# Altium PCB MAIN-PCB.PcbDoc
Units mm, origin at the board's own origin, x right, y up, seen from the top; angles counter-clockwise.
Board outline 80 x 79 mm, 2 copper layers (Top Layer, Bottom Layer), stack 1.591 mm thick; 44 components, 45 nets, 189 pads, 260 vias.
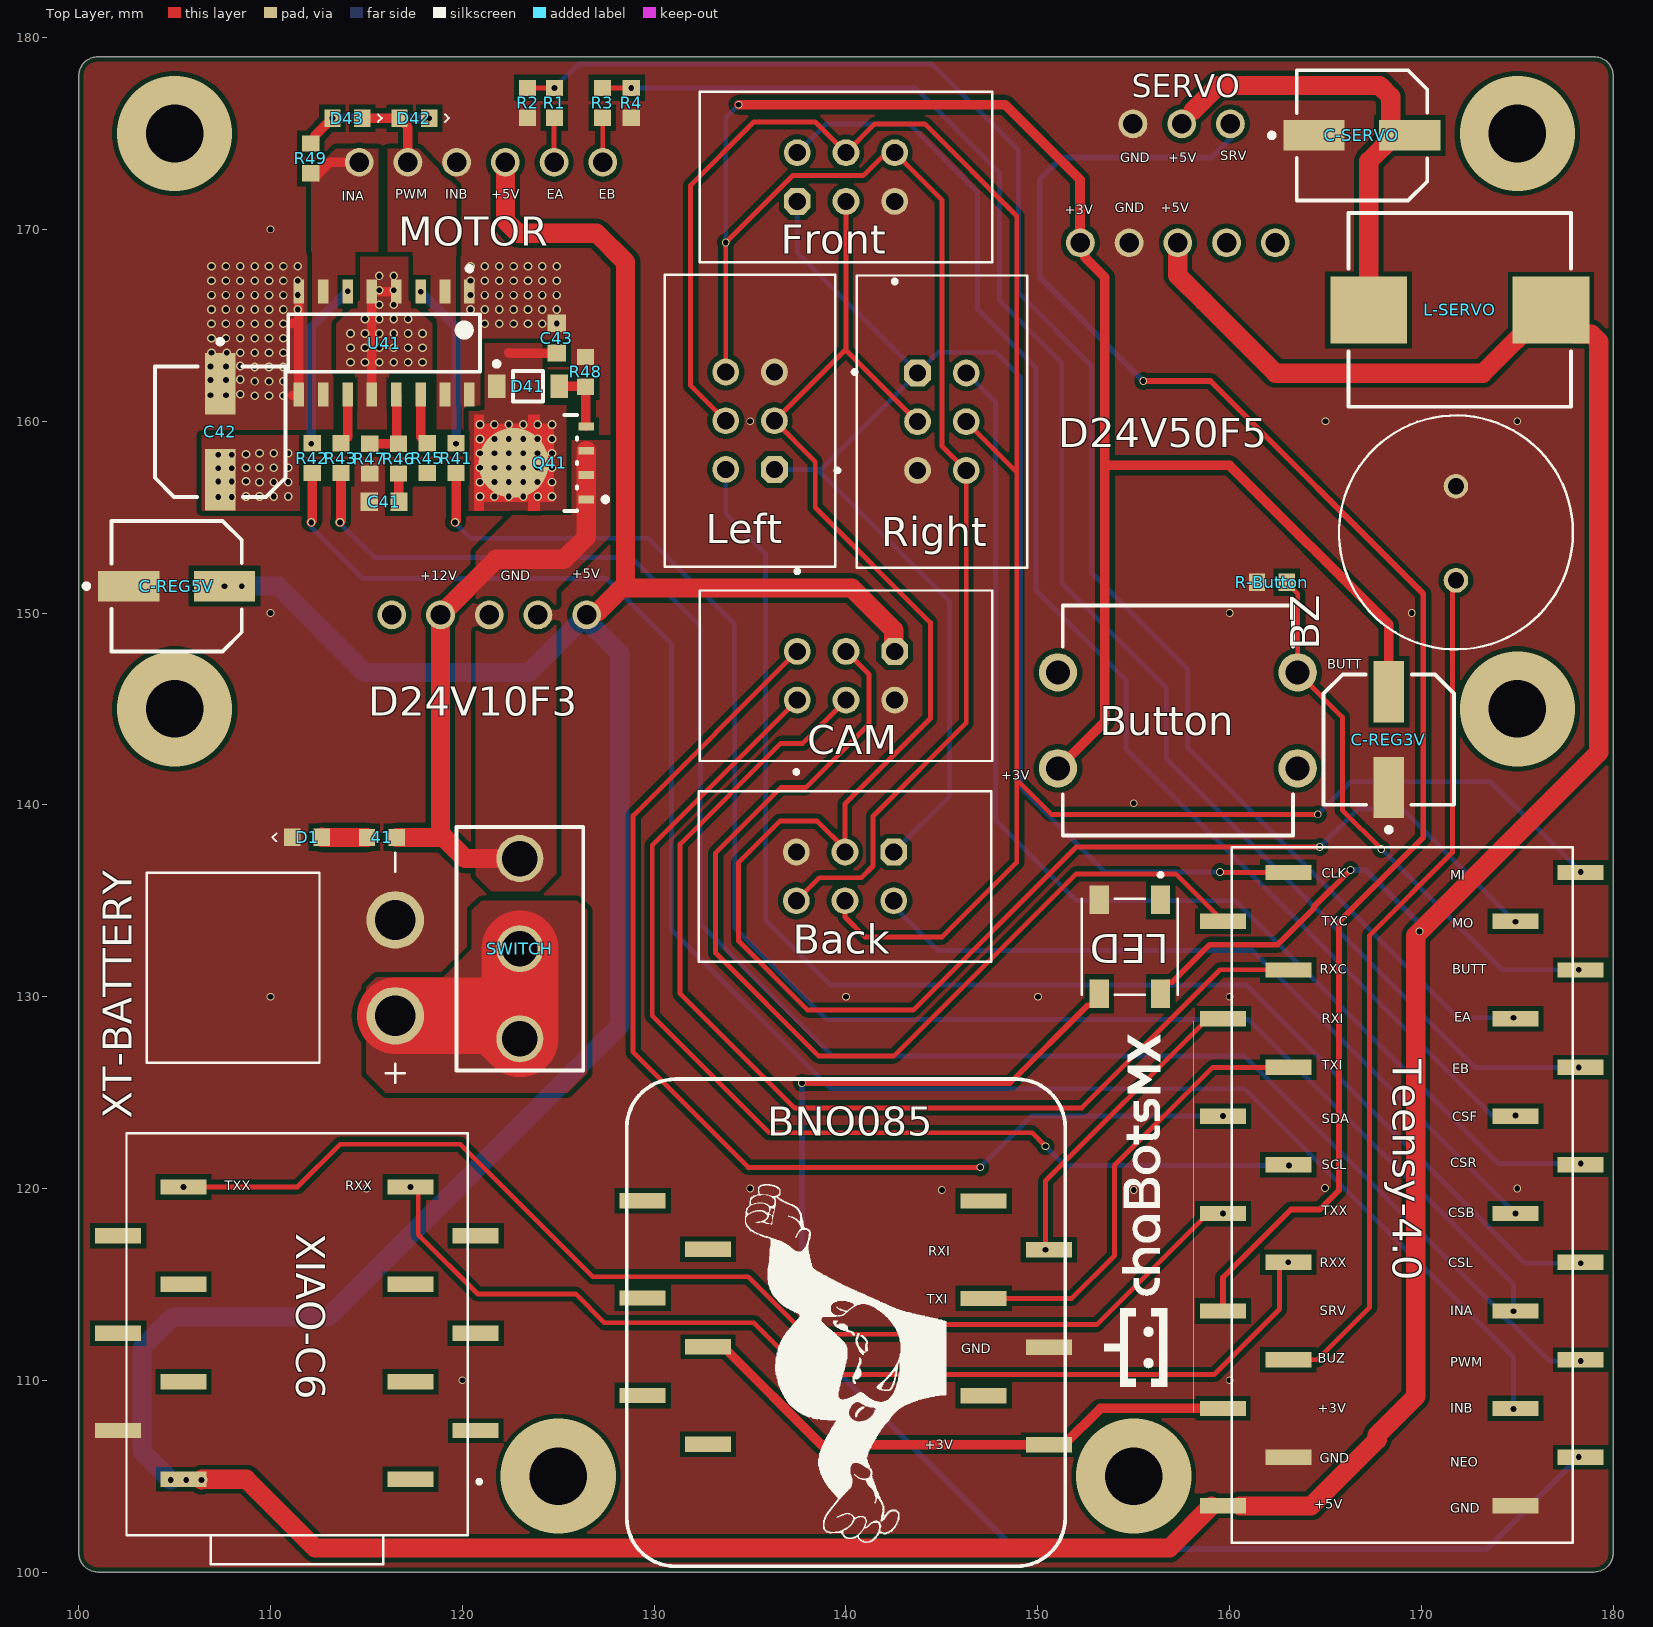
[diagram p0: Top Layer view]
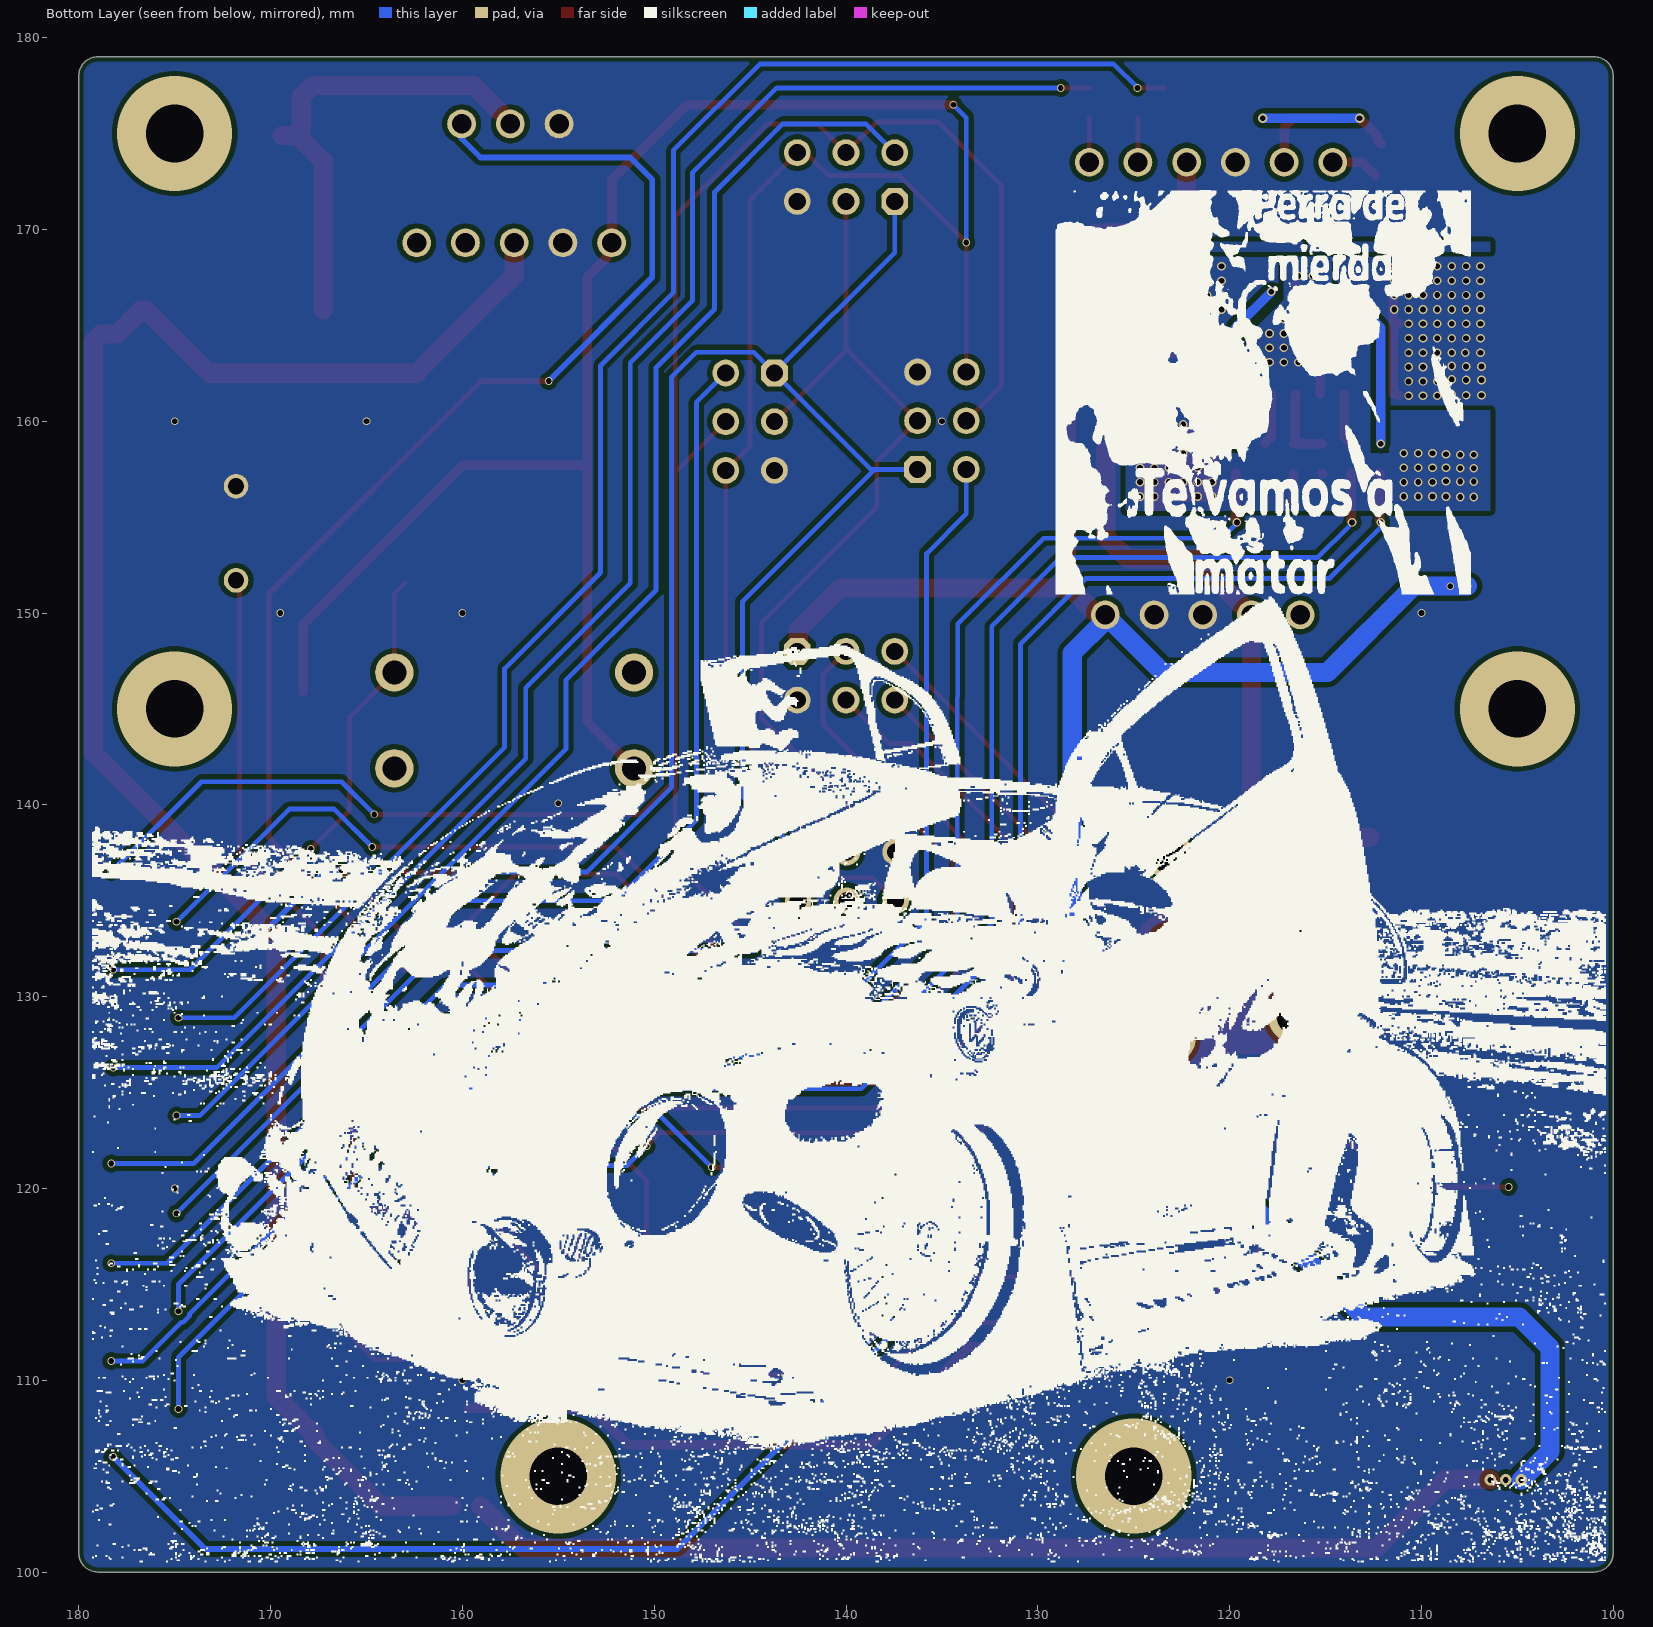
[diagram p1: Bottom Layer view, seen from below]
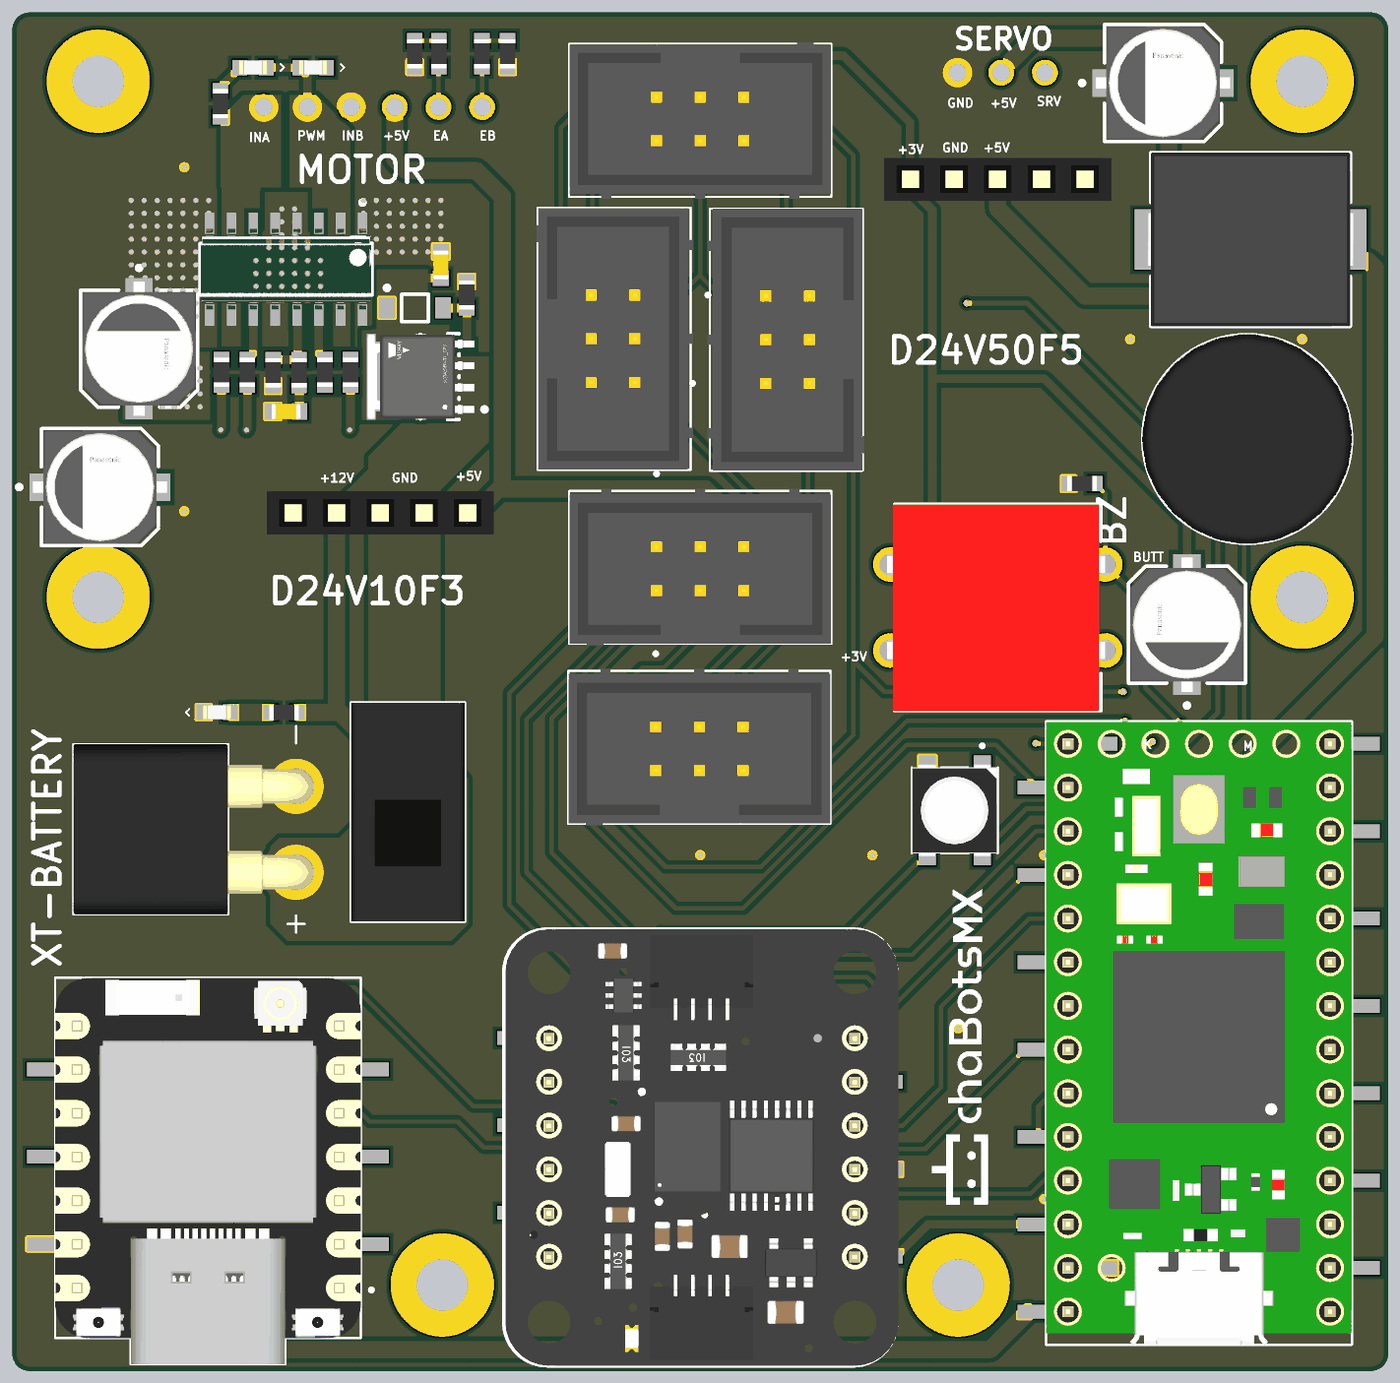
[diagram p2: 3D render of the assembled board from above, using the file's embedded part models]

## Layer stack, top to bottom
Top Solder: solder mask 0.0102, Solder Resist, Dk 3.5
Top Layer: signal copper 0.0356
Dielectric 1: dielectric 1.52, FR-4, Dk 4.8
Bottom Layer: signal copper 0.0356
Bottom Solder: solder mask 0.0102, Solder Resist, Dk 3.5

## Board outline
101,100 cw(c101,101) 100,101 100,178 cw(c101,178) 101,179 179,179 cw(c179,178) 180,178 180,101 cw(c179,101) 179,100

## Design rules (kind name [scope] priority, off if disabled: settings)
BoardOutlineClearance [All] p1: gap=0.254 ignorepadtopadclearanceinfootprint=FALSE except(0: Arc-SplitContinuation Track-SplitContinuation SMDPad-SplitContinuation THPad-SplitContinuation Via-SplitContinuation Fill-SplitContinuation Poly-SplitContinuation Region-SplitContinuation Text-SplitContinuation)
Clearance [All] p1: gap=0.254 ignorepadtopadclearanceinfootprint=FALSE
ComponentClearance [All] p1 off: gap=0.254 collisioncheckmode=3 verticalgap=0.254 showdistances=FALSE
PolygonConnect [All] p1: connectstyle=Direct reliefconductorwidth=0.254 reliefentries=4 polygonreliefangle="90 Angle" airgapwidth=0.254
RoomDefinition VNH7070-P [InComponentClass('VNH7070-P')] p1: confinementstyle=ConfineIn formatcopy=TRUE lockcomponents=FALSE outline 103.32,154.7 128.02,154.7 128.02,177 103.32,177
RoutingVias [All] p1: holewidth=0.711 width=1.27 viastyle="Through Hole" minholewidth=0.711 minwidth=1.27 maxholewidth=0.711 maxwidth=1.27
SolderMaskExpansion [All] p1: expansion=0.102 istentingtop=FALSE
SupplyNets "Schematic Supply Nets_6" [InNet('+3')] p1: voltage=0.000
SupplyNets "Schematic Supply Nets_5" [InNet('+BAT')] p2: voltage=0.000
SupplyNets "Schematic Supply Nets_4" [InNet('+5V')] p3: voltage=0.000
SupplyNets "Schematic Supply Nets_2" [InNet('+12V')] p4: voltage=0.000
SupplyNets "Schematic Supply Nets_1" [InNet('+3V3')] p5: voltage=0.000
SupplyNets "Schematic Supply Nets" [InNet('GND')] p6: voltage=0.000
Width [All] p1: maxlimit=200 minlimit=0.1 preferedwidth=0.254
29 further rules are at their usual default settings.

## Classes and differential pairs
component class VNH7070-P: C41 C42 C43 D41 D42 D43 Q41 R41 R42 R43 R45 R46 R47 R48 R49 U41
component class WRO: 3 41 * Back BNO085 Button BZ C-REG3V C-REG5V C-SERVO CAM D1 D24V10F3 D24V50F5 Front J5-CAM L-SERVO LED Left Motor R1 R2 R3 R4 R-Button Right SERVO SWITCH Teensy-4.0 xiao XIAO-C6 XT-BATTERY

## Components (designator, comment, footprint, x,y, rotation, side; value= is the part's Value field where it differs from the comment)
41 "4.7KΩ" RES_0603 115.8,138.3 r180 top
Back "IDC-6PIN-TH-2.54" IDC-6PIN-TH-2.54 139.975,136.27 r270 top
BNO085 "BNO085" BNO085 140,113 r90 top
Button "BUTTON-1212" BUTTON 157.2,144.4 r0 top
BZ "BUZZER-PS1240P02BT" BUZZER 171.8,154.2 r90 top
C41 "10NF" CAP_0603 115.92,155.8 r0 top
C42 "270UF" FP-FTD8-MFG 107.37,159.45 r270 top
C43 "0.1UF" CAP_0603 124.92,164.325 r90 top
C-REG3V "47UF" FP-FTD8-MFG 168.3,143.4 r90 top
C-REG5V "47UF" FP-FTD8-MFG 105.1,151.4 r0 top
C-SERVO "270UF" FP-FTD8-MFG 166.9,174.9 r0 top
CAM "IDC-6PIN-TH-2.54" IDC-6PIN-TH-2.54 140.025,146.73 r270 top
D1 "LED_0603" LED_0603 111.9,138.3 r180 top
D24V10F3 "REG-5V" 5PIN-TH 121.4,149.9 r180 top
D24V50F5 "REG-3V" 5PIN-TH 157.3,169.3 r0 top
D41 "MMSZ4702T1G" ONSC-SOD-123-2-425-04_V 123.42,161.825 r0 top
D42 "LED_0603" LED_0603 117.5,175.8 r0 top
D43 "LED_0603" LED_0603 114,175.8 r0 top
Front "IDC-6PIN-TH-2.54" IDC-6PIN-TH-2.54 139.975,172.73 r90 top
L-SERVO "22UH" WRO-INDUCTOR 172,165.8 r0 top
LED "NEOPIXEL-5050" NEOPIXEL-5050 154.8,132.6 r90 top
Left "IDC-6PIN-TH-2.54" IDC-6PIN-TH-2.54 135,160 r180 top
MOTOR "6PIN-TH" 6PIN-TH 121,173.5 r0 top (schematic designator Motor)
Q41 "SQJ409EP-T1_GE3" FP-T16-0221-SINGLE-MFG 123.74,157.825 r90 top
R1 "10KΩ" RES_0603 124.8,176.6 r270 top
R2 "10KΩ" RES_0603 123.4,176.6 r90 top
R3 "10KΩ" RES_0603 127.3,176.6 r270 top
R4 "10KΩ" RES_0603 128.8,176.6 r90 top
R41 "1KΩ" RES_0603 119.67,158.075 r90 top
R42 "1KΩ" RES_0603 112.17,158.075 r90 top
R43 "1KΩ" RES_0603 113.67,158.075 r90 top
R45 "1KΩ" RES_0603 118.17,158.075 r90 top
R46 "10KΩ" RES_0603 116.67,158.05 r90 top
R47 "1.5KΩ" RES_0603 115.17,158.05 r90 top
R48 "1KΩ" RES_0603 126.42,162.575 r270 top
R49 "4.7KΩ" RES_0603 112.1,173.7 r270 top
R-Button "10KΩ" RES_0603 162.2,151.6 r180 top
Right "IDC-6PIN-TH-2.54" IDC-6PIN-TH-2.54 145,160 r0 top
SERVO "3PIN" 3PIN 157.5,175.5 r180 top
SWITCH "Slide Switch 6A" "SLIDE SWITCH 6A" 123,132.5 r0 top
Teensy-4.0 "Teensy-4.0-SMD" TEENSY-4.0-SMD 169,120 r180 top
U41 "VNH7070ASTR" FP-SO-16N-GAPGCFT00818-MFG 115.92,164.075 r270 top
XIAO-C6 "XIAO-C6-S3-SMD" XIAO-C6-S3-SMD 111.405,112.397 r180 top
XT-BATTERY "XT30_PW_M" XT30_PW_M 106.5,131.5 r90 top

## Footprints (in the part's own frame and the unit in brackets; to place one, negate y for a bottom-side part, rotate by r counter-clockwise, add the part's x,y. Pads: shape width x height; smd on the part's side, far side on the other; paste and mask are expansions set on the pad)
3PIN [mm]
  round 1.5 hole 1.02: 1(-2.54,0) 2(0,0) 3(2.54,0)
5PIN-TH [mm]
  round 1.5 hole 1.02: 1(-5.08,0) 2(-2.54,0) 3(0,0) 4(2.54,0) 5(5.08,0)
  body extent -6.6,-1.25 6.6,1.25, height 4.6
6PIN-TH [mm]
  round 1.5 hole 1.02: 1(-6.38,0) 2(-3.84,0) 3(-1.3,0) 4(1.24,0) 5(3.78,0) 6(6.32,0)
BNO085 [mm]
  rect 0.8x2.4 smd: 3V(-3.815,-7.175) BT(-6.335,7.2) CS(6.365,10.6) DI(3.825,7.2) GND(-1.275,-10.575) INT(6.345,-7.175) P0(-3.795,10.6) P1(-1.255,7.2) RST(1.285,10.6) SCL(1.265,-7.175) SDA(3.805,-10.575) VIN(-6.355,-10.575)
  silkscreen extent -12.7,-11.43 12.7,11.43, body extent -12.7,-11.53 12.7,11.33, height 15.6
BUTTON [mm]
  round 2 hole 1.25: 1(-6.15,2.5) 2(6.35,2.5) 3(-6.15,-2.5) 4(6.35,-2.5)
  silkscreen extent -5.9,-6 6.1,6, body extent -6.9,-6 6.9,6, height 10.3
BUZZER [mm]
  round 1.28 hole 0.85: 1(-2.5,0) 2(2.413,0)
  silkscreen extent -6.1,-6.1 6.1,6.1, body extent -6.1,-6.1 6.1,6.1, height 6.5
CAP_0603 [mm] "Chip Capacitor, 2-Leads, Body 1.60x0.80mm, IPC Medium Density"
  rect 0.9x0.95 smd: 1(-0.775,0) 2(0.775,0)
  body extent -0.85,-0.45 0.85,0.45, height 0.55
FP-FTD8-MFG [mm]
  rect 3.2x1.6 smd paste+0 mask+0: 1(-2.5,0) 2(2.5,0)
  silkscreen extent -4.82,-3.4 3.4,3.4, body extent -4.35,-3.65 4.35,3.65, height 0.25
FP-SO-16N-GAPGCFT00818-MFG [mm]
  rect 1.25x0.55 smd paste+0 mask+0: 1(-2.675,4.445) 2(-2.675,3.175) 3(-2.675,1.905) 4(-2.675,0.635) 5(-2.675,-0.635) 6(-2.675,-1.905) 7(-2.675,-3.175) 8(-2.675,-4.445) 9(2.675,-4.445) 10(2.675,-3.175) 11(2.675,-1.905) 12(2.675,-0.635) 13(2.675,0.635) 14(2.675,1.905) 15(2.675,3.175) 16(2.675,4.445)
  silkscreen extent -4,-5 1.5,5, body extent -3.4,-5.1 3.4,5.1, height 0.25
FP-T16-0221-SINGLE-MFG [mm]
  rect 0.41x0.82 smd paste+0 mask+0: 1(-1.905,-2.715) 2(-0.635,-2.715) 3(0.635,-2.715) 4(1.905,-2.715)
  round 3.655 smd paste+0 mask+0: 5(0,1.07)
  Top Layer region: -2.5,3.125 2.5,3.125 2.5,2.615 2.03,2.615 2.03,0.305 2.5,0.305 2.5,-0.305 2.03,-0.305 2.03,-1.015 -2.03,-1.015 -2.03,-0.305 -2.5,-0.305 -2.5,0.305 -2.03,0.305 -2.03,2.615 -2.5,2.615
  silkscreen extent -2.5,-3.84 2.5,-1.57, body extent -2.73,-3.22 2.73,3.22, height 0.25
IDC-6PIN-TH-2.54 [mm]
  oct 1.398x1.398 hole 0.89: 1(-1.27,2.515)
  round 1.398 hole 0.89: 2(-1.27,-0.025) 3(-1.27,-2.565) 4(1.27,-2.565) 5(1.27,-0.025) 6(1.27,2.515)
  silkscreen extent -5.54,-7.65 4.45,7.59, body extent -4.57,-7.64 4.53,7.58, height 9
LED_0603 [mm]
  rect 0.85x0.9 smd: A(-0.776,-0.009) C(0.774,-0.009)
  silkscreen extent 1.6,-0.2 1.8,0.2, body extent -0.8,-0.4 0.8,0.4, height 0.35
NEOPIXEL-5050 [mm]
  rect 1.5x1 smd: 1(2.45,-1.6) 2(2.45,1.6) 3(-2.45,1.6) 4(-2.45,-1.6)
  silkscreen extent -2.5,-2.5 3.85,2.5, body extent -2.7,-2.49 2.7,2.51, height 1.5
ONSC-SOD-123-2-425-04_V [mm] "SOD, 2-Leads, Body 2.69x1.6mm"
  rect 0.91x1.22 smd: 1(-1.635,0) 2(1.635,0)
  silkscreen extent -1.76,-0.8 0.78,1.28, body extent -1.35,-0.8 1.35,0.8, height 1.35
RES_0603 [mm] "Chip Resistor, 2-Leads, Body 1.60x0.80mm, IPC Medium Density"
  rect 0.85x0.9 smd: 1(-0.775,0) 2(0.775,0)
  body extent -0.85,-0.45 0.85,0.45, height 0.55
"SLIDE SWITCH 6A" [mm]
  round 2.45 hole 1.85: 1(0,4.7) 2(0,0) 3(0,-4.7)
  silkscreen extent -3.3,-6.35 3.3,6.35, body extent -3.3,-6.35 3.3,6.35, height 13.33
TEENSY-4.0-SMD [mm]
  rect 2.4x0.8 smd: 0(-9.3,14.01) 1(-5.9,11.47) 2(-9.3,8.93) 3(-5.9,6.39) 3.3V(9.34,11.47) 4(-9.3,3.85) 5(-5.9,1.31) 6(-9.3,-1.23) 7(-5.9,-3.77) 8(-9.3,-6.31) 9(-5.9,-8.85) 10(-9.3,-11.39) 11(-5.9,-13.93) 12(-9.3,-16.47) 13(5.94,-16.47) 14(9.34,-13.93) 15(5.94,-11.39) 16(9.34,-8.85) 17(5.94,-6.31) 18(9.34,-3.77) 19(5.94,-1.23) 20(9.34,1.31) 21(5.94,3.85) 22(9.34,6.39) 23(5.94,8.93) GND1(-5.9,16.55) GND2(5.94,14.01) VIN(9.34,16.55)
  silkscreen extent -8.89,-17.78 8.89,18.48, body extent -8.89,-17.74 8.89,18.52, height 15.44
WRO-INDUCTOR [mm] "Molded Inductor, 2-Leads, Body 11.55x10.05mm, IPC Medium Density"
  rect 4x3.5 smd: 1(-4.75,0) 2(4.75,0)
  silkscreen extent -5.8,-5.05 5.8,5.05, body extent -6.02,-5.05 6.02,5.05, height 4
XIAO-C6-S3-SMD [mm]
  rect 2.4x0.8 smd: 1(-5.89,7.56) 2(-9.29,5.02) 3(-5.89,2.48) 4(-9.29,-0.06) 5(-5.89,-2.6) 6(-9.29,-5.14) 7(-5.89,-7.68) 8(5.95,-7.68) 9(9.35,-5.14) 10(5.95,-2.6) 11(9.35,-0.06) 12(5.95,2.48) 13(9.35,5.02) 14(5.95,7.56)
  silkscreen extent -9.57,-10.48 8.92,12, body extent -8.86,-10.46 8.92,12, height 15.51
XT30_PW_M [mm]
  round 3 hole 2.1: N(2.5,-10) P(-2.5,-10)
  silkscreen extent -6,-10.5 6,2.95, body extent -4.95,-11 4.95,2.95, height 5

## Part data
41 R1 R2 R3 R4 R41 R42 R43 R45 R46 R47 R48 R49 R-Button: library part RES_0603, "Resistor SMD 0603 generic"
Button: library part BUTTON
C41 C43: library part CAP_0603, "Capacitor SMD 0603 generic"
C42 C-REG3V C-REG5V C-SERVO: library part CMP-05427-000088-1, "CAP ALUM 220UF 20% 25V SMD", Capacitance=220uF, Case/Package=Radial, Dielectric Material=Aluminium, ESR (Equivalent Series Resistance)=160mR, Leakage Current=55uA, Max Operating Temperature=105°C, Min Operating Temperature=-55°C, Package Quantity=1, Ripple Current=600mA, Tolerance=20%, Voltage=25V, Construction=Cylindrical, Contact Plating=Tin, Diameter=6.3mm, Height=7.7mm, Height - Seated (Max)=0.315inch, Lead Diameter=0.65mm, Lead Free="Lead Free", Lead Pitch=1.8mm, Length=7.7mm, Life (Hours)=2000Hour, Mount="Surface Mount", Number of Pins=8, Packaging="Tape and Reel", Radiation Hardening=No, REACH SVHC="No SVHC", Ripple Current (AC)=600mA, RoHS Compliant=Yes, Series=FT, Termination=SMD/SMT, Voltage Rating=25V, Voltage Rating (DC)=25V
D24V10F3 D24V50F5: library part 5PIN-TH, "2.54 Header"
D41: library part CMP-1060-00296-1, "Zener Voltage Regulator, 500 mW, 2-Pin SOD-123, Pb-Free, Tape and Reel", Manufacturer="On Semiconductor", ComponentLink1Description="Manufacturer URL", ComponentLink1URL=http://www.onsemi.com/, ComponentLink2Description=Datasheet, ComponentLink2URL=http://www.onsemi.com/pub_link/Collateral/MMSZ4678T1-D.PDF, ComponentLink3Description="Package Specification", ComponentLink3URL=http://www.onsemi.com/pub_link/Collateral/425-04.PDF, DatasheetVersion="Rev. 9", Mounting Technology="Surface Mount", P Max (W)=0.5, PackageDescription="2-Pin SOD, Body 1.6 x 2.69 mm", PackageReference=SOD-123-2-425-04, PackageVersion="Rev. G, 10/2009", Packing="Tape and Reel", PartNumber=MMSZ4702T1G, RoHS=Pb-Free, VZ Typ (V)=15
L-SERVO: library part WRO-INDUCTOR, "Voltage Boost Inductor"
Q41: library part CMP-02550-000144-1, "MOSFET P-CH 40V 60A POWERPAKSO-8", Continuous Drain Current=-60A, Drain To Source Breakdown Voltage=-40V, Drain To Source Resistance=0.0058Ω, Gate To Source Voltage=20V, Input Capacitace At Vds="8400pF @ -25V", Manufacturer=Vishay, Max Forward Diode Voltage=-1.2V, Max Junction Temp=+175°C, Package=T16-0221-SINGLE, Power Dissipation=68W, Pulse Drain Current=-150A, Temperature="-55°C to +175°C", Temperature Range Low=-55°C, Typ Forward Diode Voltage=-0.76V, Automotive=Yes, Automotive Grade="Grade 0", Category=Trans, ComponentLink2Description=Datasheet, ComponentLink2URL=https://www.vishay.com/docs/77707/sqj409ep.pdf, Depletion Mode=False, Device Class L1="Discrete Semiconductors", Device Class L2=Transistors, Device Class L3=MOSFETs, Digikey Description="MOSFET P-CH 40V 60A POWERPAKSO-8", Drain To Source Voltage=-40V, Footprint Url=http://www.vishay.com/docs/63818/ppso8ls.pdf, Gate Charge At Vgs="170nC @ -10V", Height=1.267mm, Lead Free=Yes, Manufacturer Part Number=SQJ409EP-T1_GE3, Mouser Description="Trans MOSFET P-CH 40V 60A Automotive 5-Pin(4+Tab) PowerPAK SO T/R", Number of Channels=1, Number Of P Channels=1, Octopart=https://octopart.com/sqj409ep-t1_ge3-vishay-82218774, Reverse Recovery Charge=45nC, Reverse Recovery Time=39ns, RoHS=TRUE, Rthja Max=68°C/W, Standoff Height=0mm, Temperature Range High=+175°C, Threshold Vgs Max=-2.5V, Threshold Vgs Min=-1.5V, Transconductance=54S, Turn Off Delay Time=75ns, Turn On Delay Time=23ns
SERVO: "2.54 Header"
U41: library part CMP-2000-07519-2, "IC MOTOR DRIVER 4V-28V 16SOIC", Manufacturer=STMicroelectronics, Max Junction Temp=+150°C, Max Supply Voltage=28V, Min Supply Voltage=4V, Nominal Supply Current=2-3.5mA, Output Current=15A, Package=SO-16N-GAPGCFT00818, Temperature="-40°C to +150°C", Temperature Range Low=-40°C, Automotive=Yes, Automotive Grade="Grade 0", Category=IC, ComponentLink2Description=Datasheet, ComponentLink2URL=https://www.st.com/resource/en/datasheet/vnh7070as.pdf, Device Class L1="Integrated Circuits (ICs)", Device Class L2="Power Management ICs", Device Class L3="Motor Drivers", Digikey Description="IC MOTOR DRIVER 4V-28V 16SOIC", Footprint Url=https://www.st.com/resource/en/datasheet/l6566a.pdf, Height=1.75mm, Ipc Land Pattern Name=SOIC127P600X175-16, Lead Free=Yes, Manufacturer Part Number=VNH7070ASTR, Motor Type=Brushed, Mouser Description="STMicroelectronics VNH7070ASTR Motor Driver IC 16-Pin, SOIC", Number Of Outputs=2, Octopart=https://octopart.com/vnh7070astr-stmicroelectronics-66668687, RoHS=TRUE, Standoff Height=0.1mm, Temperature Range High=+150°C

## Via types
v1: diameter 0.45, hole 0.3, Top Layer to Bottom Layer, tented both sides, 193 vias
v2: diameter 0.4, hole 0.3, Top Layer to Bottom Layer, 56 vias
v3: diameter 6, hole 3, Top Layer to Bottom Layer, 6 vias
v4: diameter 0.6, hole 0.3, Top Layer to Bottom Layer, 3 vias
v5: diameter 0.5, hole 0.3, Top Layer to Bottom Layer, 2 vias

## Nets (pads, with @x,y where several pads share a name; then routed paths per layer and width w, separated by ;. In a path a pad name is that pad's centre, name@x,y a point inside that pad or via, vN(x,y) a via of type N, cw(c..) or ccw(c..) an arc to the next point about the centre after c; other vN are vias at no path point)
+3: BNO085.P1 BNO085.VIN Teensy-4.0.3.3V | length 29.8
  Top Layer w0.5: BNO085.P1 133.6,111.745 138.7,106.645 150.575,106.645 151.375,106.645 153.26,108.53 Teensy-4.0.3.3V
+3V3: Back.4 Button.3 C-REG3V.2 D24V50F5.1 Front.4 Left.4 Right.4 | length 143.9
  Top Layer w0.254: Left.4 v2(133.73,169.317) 137.213,172.8 140.9,172.8 141.881,173.781 142.321,173.781 Front.4 145,171.54 145,158.705 Right.4 146.27,144.27 141.41,139.41 141.41,136.81 140.8,136.2 138.61,136.2 Back.4
  Top Layer w0.5: v2(134.4,176.5) 148.3,176.5 152.2,172.6 D24V50F5.1@152.2,169.3 ; Button.3 153.5,144.35 153.5,157.7 ; D24V50F5.1 152.458,169.062 152.458,168.542 153.5,167.5 153.5,157.7 ; C-REG3V.2 168.3,149.4 160,157.7 153.5,157.7
  Bottom Layer w0.254: v2(133.73,169.317) 133.73,175.83 v2(134.4,176.5)
+5V: C-REG5V.2 CAM.1 D24V10F3.1 D24V50F5.3 L-SERVO.2 LED.4 MOTOR.4 Teensy-4.0.VIN XIAO-C6.14 | length 300.4
  Top Layer w0.3: LED.4 156.4,130.4 156.75,130.75 157,130.75 158.95,132.7 162.5,132.7 164.39,134.59 164.39,134.69 v2(166.3,136.6)
  Top Layer w1: v4(106.4,104.8) 106.437,104.837 108.736,104.837 112.327,101.246 156.856,101.246 Teensy-4.0.VIN@159.06,103.45 ; MOTOR.4 122.24,170.46 122.9,169.8 127,169.8 128.5,168.3 128.5,151.5 127.05,150.05 126.835,150.05 126.585,149.8 D24V10F3.1@126.45,149.8 ; 128.5,151.3 140.3,151.3 142.485,149.115 142.485,148.055 CAM.1 ; D24V50F5.3 157.3,167.6 158.65,166.25 162.4,162.5 173.2,162.5 176.5,165.8 L-SERVO.2 178,164.55 178.85,164.55 179.246,164.154 179.246,142.732 169.7,133.186 169.7,109.15 167.7,107.15 ; Teensy-4.0.VIN@160.55,103.45 164.25,103.45 167.7,106.9
  Bottom Layer w0.3: v2(166.3,136.6) 167.1,136.6 169.9,133.8 v2(169.9,133.4)
  Bottom Layer w1: v4(104.8,104.8) 103.3,106.3 103.3,111.7 104.9,113.3 113,113.3 128.2,128.5 128.2,147.915 126.45,149.665 D24V10F3.1@126.45,149.8 ; v2(107.6,151.4) v2(108.5,151.4) 110.4,151.4 114.9,146.9 123.48,146.9 D24V10F3.1
  other v4: 105.6,104.8
+12V: 41.1 D24V10F3.4 Q41.1 Q41.2 Q41.3 SWITCH.1 | length 32.3
  Top Layer w1: 41.1 119.041,138.3 ; SWITCH.1 120.141,137.2 119.041,138.3 ; Q41.3 Q41.2 Q41.1 126.455,153.955 125.3,152.8 121.76,152.8 D24V10F3.4 118.86,138.481 119.041,138.3
+BAT: SWITCH.2 SWITCH.3 XT-BATTERY.P | length 11.7
  Top Layer w4: XT-BATTERY.P 121.8,129 SWITCH.3 SWITCH.2
BUTTON: Button.2 R-Button.1 Teensy-4.0.10 | length 28.8
  Top Layer w0.254: R-Button.1 162.975,151.575 163.55,151 Button.2 165.878,144.572 165.878,139.722 v2(167.9,137.7)
  Bottom Layer w0.254: v2(167.9,137.7) 174.2,131.4 v2(178.2,131.4)
BUZZER: BZ.1 Teensy-4.0.23 | length 45.1
  Top Layer w0.254: Teensy-4.0.23 164.57,111.07 167.3,113.8 167.3,133.2 171.619,137.519 171.619,151.519 BZ.1
CS1: Front.6 Teensy-4.0.7 | length 72
  Bottom Layer w0.25: Front.6 138.96,175.5 143.3,175.5 146.85,171.95 146.85,165.85 149.9,162.8 149.9,151.2 154.6,146.5 154.6,142.9 173.7,123.8 v2(174.9,123.8)
CS2: Left.6 Teensy-4.0.4 | length 74.3
  Bottom Layer w0.25: Left.6 133.73,155.17 135.8,153.1 135.8,134 139.2,130.6 160.9,130.6 175.4,116.1 v2(178.3,116.1)
CS3: Right.6 Teensy-4.0.6 | length 61.9
  Bottom Layer w0.25: Right.6 147.8,160.985 147.8,139.2 152,135 160.3,135 174,121.3 v2(178.3,121.3)
CS4: Back.6 Teensy-4.0.5 | length 39.3
  Bottom Layer w0.25: Back.6 142.49,134.71 144.8,132.4 161.2,132.4 v2(174.9,118.7)
EA: R1.1 R2.2 Teensy-4.0.9 | length 85.6
  Top Layer w0.25: R2.2 v2(124.8,177.375)
  Bottom Layer w0.25: v2(124.8,177.375) 126.046,178.621 144.5,178.621 149,174.121 149,166.7 152.8,162.9 152.8,152.1 157.8,147.1 157.8,143 171.9,128.9 v2(174.8,128.9)
EB: R3.1 R4.2 Teensy-4.0.8 | length 84.9
  Top Layer w0.25: R3.1 v2(128.8,177.375)
  Bottom Layer w0.25: v2(128.8,177.375) 143.6,177.375 148,172.975 148,166.3 151.25,163.05 151.25,151.55 156.7,146.1 156.7,142.4 172.8,126.3 v2(178.2,126.3)
GND: Back.3 BNO085.GND BZ.2 C41.1 C42.1 C43.2 C-REG3V.1 C-REG5V.1 C-SERVO.1 CAM.6 D1.C D24V10F3.2 D24V10F3.3 D24V50F5.2 Front.3 LED.2 Left.3 MOTOR.3 R2.1 R4.1 R47.1 R48.1 R-Button.2 Right.3 SERVO.3 Teensy-4.0.GND1 Teensy-4.0.GND2 U41.1 U41.8 U41.9 U41.16 XIAO-C6.13 XT-BATTERY.N | length 10
  Top Layer w0.5: 111.17,161.35 111.183,161.338 ; 111.17,165.1 111.183,165.088 ; U41.8@111.45,166.875 111.475,166.85 U41.8 111.475,166.575 U41.9 v1@111.475,165.825 ; R47.1@115.158,157.263 R47.1
  other v1: 109.17,161.325 109.92,161.325 110.67,161.325 106.87,161.35 107.67,161.35 108.42,161.4 109.17,162.075 109.92,162.075 110.67,162.075 106.87,162.15 107.67,162.15 108.42,162.175 109.17,162.825 109.92,162.825 110.67,162.825 106.87,162.85 107.67,162.85 108.42,162.875 106.92,163.575 107.72,163.575 108.42,163.575 109.17,163.575 109.92,163.575 110.67,163.575 106.92,164.325 107.67,164.325 108.42,164.325 109.17,164.325 109.92,164.325 110.67,164.325 106.92,165.075 107.67,165.075 108.42,165.075 109.17,165.075 109.92,165.075 110.67,165.075 121.17,165.075 121.92,165.075 122.67,165.075 123.42,165.075 124.17,165.075 124.92,165.1 106.92,165.825 107.67,165.825 108.42,165.825 109.17,165.825 109.92,165.825 110.67,165.825 111.42,165.825 120.42,165.825 121.17,165.825 121.92,165.825 122.67,165.825 123.42,165.825 124.17,165.825 124.92,165.825 106.92,166.575 107.67,166.575 108.42,166.575 109.17,166.575 109.92,166.575 110.67,166.575 111.42,166.575 120.42,166.575 121.17,166.575 121.92,166.575 122.67,166.575 123.42,166.575 124.17,166.575 124.92,166.575 106.92,167.325 107.67,167.325 108.42,167.325 109.17,167.325 109.92,167.325 110.67,167.325 111.42,167.325 120.42,167.325 121.17,167.325 121.92,167.325 122.67,167.325 123.42,167.325 124.17,167.325 124.92,167.325 106.92,168.075 107.67,168.075 108.42,168.075 109.17,168.075 109.92,168.075 110.67,168.075 111.42,168.075 120.42,168.075 121.17,168.075 121.92,168.075 122.67,168.075 123.42,168.075 124.17,168.075 124.92,168.075
  other v2: 120,110 160,110 145,119.919 155,119.919 115,120 135,120 175,120 164.973,120.027 110,130 140,130 150.011,129.989 160,130 155,140.081 110,150 160,150 169.496,150 135,160 165,160 175,160 110,170
MCLK: Back.1 Front.1 Left.1 Right.1 Teensy-4.0.13 | length 88.6
  Top Layer w0.25: v2(159.5,136.5) 159.53,136.47 Teensy-4.0.13
  Bottom Layer w0.25: Left.1 138.5,157.485 ; Front.1 137.46,168.785 Right.1 ; Back.1 145.4,140.45 145.4,150.585 138.5,157.485 ; v2(159.5,136.5) 153.5,136.5 149.1,140.9 149.1,162.3 147.8,163.6 144.815,163.6 Right.1 ; 138.5,157.485 138.7,157.485 Right.1
MISO: Back.5 Front.5 Left.5 Right.5 Teensy-4.0.12 | length 116.7
  Top Layer w0.254: Left.5 131.9,161.855 131.9,172.3 135.2,175.6 138.4,175.6 Front.5 141.5,175.5 144.1,175.5 148.9,170.7 148.9,157.345 ; Back.5 139.95,134.15 141,133.1 145,133.1 148.9,137 148.9,141.3 ; Right.5 148.9,157.345 ; v2(164.6,139.5) 150.7,139.5 148.9,141.3 ; 148.9,141.3 148.9,157.345
  Bottom Layer w0.254: v2(164.6,139.5) 166.3,141.2 173.6,141.2 v2(178.3,136.5)
MOSI: Back.2 Front.2 Left.2 Right.2 Teensy-4.0.11 | length 105.9
  Top Layer w0.254: Back.2 Back.2@139.95,137.7 ; Front.2 140,163.755 ; Right.2 140,163.705 140,163.755 ; v2(164.7,137.8) 152,137.8 143.5,129.3 138,129.3 134.4,132.9 134.4,137 136.55,139.15 138.5,139.15 Back.2@139.95,137.7 ; Back.2@139.95,137.7 139.95,140.05 144.4,144.5 144.4,149.5 138.4,155.5 138.4,157.895 Left.2 140,163.755
  Bottom Layer w0.254: v2(164.7,137.8) 166.679,139.779 169.021,139.779 v2(174.9,133.9)
NEOPIXEL: LED.3 Teensy-4.0.0 | length 78
  Top Layer w0.3: v2(137.7,125.5) 148.55,125.5 152.6,129.55 152.85,129.55 153.2,129.9 LED.3
  Bottom Layer w0.3: v2(137.7,125.5) 137.7,112.3 148.8,101.2 173.4,101.2 178.19,105.99 v2@178.3,105.99
  other v2: 178.2,106
Net41_2: 41.2 D1.A | length 2.4
  Top Layer w1: D1.A 112.685,138.3 41.2
NetC41_2: C41.2 R46.1 | length 1.5
  Top Layer w0.5: R46.1 116.682,157.263 116.682,155.813 C41.2
NetC-SERVO_2: C-SERVO.2 L-SERVO.1 SERVO.2 | length 23.6
  Top Layer w1: 158.1,176.2 159.4,177.5 167.811,177.5 168.397,176.914 168.397,175.2 168.697,174.9 C-SERVO.2 ; L-SERVO.1 167.25,173.55 C-SERVO.2@168.6,174.9
NetD41_2: D41.2 Q41.4 R48.2 | length 3.4
  Top Layer w0.5: D41.2 125.067,161.813 126.407,161.813 R48.2 ; R48.2@126.437,161.783 126.437,159.747 Q41.4
NetD42_C: D42.C D43.A R49.1 | length 6.9
  Top Layer w0.5: R49.1 112.125,174.475 112.3,174.65 112.3,174.867 113.024,175.591 113.049,175.591 113.224,175.766 v5(113.224,175.791)
  Bottom Layer w0.5: v5(113.224,175.791) v5(118.274,175.791)
NetMotor_5: MOTOR.5 R1.2 | length 2.3
  Top Layer w0.25: MOTOR.5 124.78,175.805 R1.2
NetMotor_6: MOTOR.6 R3.2 | length 2.3
  Top Layer w0.25: R3.2 127.32,175.805 MOTOR.6
NetR41_1: R41.1 Teensy-4.0.3 | length 84.9
  Top Layer w0.5: v1(119.62,154.725) 119.62,154.752 119.67,154.802 R41.1
  Bottom Layer w0.25: v1@119.597,154.703 120.4,153.9 129.7,153.9 134.171,149.429 134.171,145.639 134.2,145.61 134.2,133.6 139,128.8 161,128.8 174.8,115 v2(174.8,113.6)
NetR41_2: R41.2 U41.3 | length 8.7
  Bottom Layer w0.5: v1(117.825,166.75) 119.67,164.905 v1@119.67,158.852
  other v1: 119.67,158.825
NetR42_1: R42.1 Teensy-4.0.1 | length 94.9
  Top Layer w0.5: v1(112.12,154.725) 112.12,154.752 112.17,154.802 R42.1
  Bottom Layer w0.25: v1(112.12,154.725) 112.12,154.48 114.8,151.8 127.5,151.8 130.9,148.4 130.9,133.5 139.2,125.2 160.8,125.2 174.8,111.2 v2(174.8,108.5)
NetR42_2: R42.2 U41.6 | length 8.7
  Bottom Layer w0.5: v1(112.12,158.825) 112.12,164.875 v1(114.02,166.775)
NetR43_1: R43.1 Teensy-4.0.2 | length 94.3
  Top Layer w0.5: v1(113.62,154.725) 113.62,154.752 113.67,154.802 R43.1
  Bottom Layer w0.25: 113.8,154.5 115.4,152.9 128.8,152.9 132.4,149.3 132.4,133.8 139.3,126.9 160.781,126.9 174.221,113.46 174.221,113.36 174.56,113.021 174.66,113.021 176.681,111 v2(178.3,111)
NetR43_2: R43.2 U41.11 | length 2.7
  Top Layer w0.5: R43.2 113.695,158.85 114.015,159.17 U41.11
NetR45_2: R45.2 U41.14 | length 2.7
  Top Layer w0.5: U41.14 117.825,159.17 118.145,158.85 R45.2
NetR46_2: R46.2 R47.2 U41.13 | length 4.1
  Top Layer w0.5: R47.2 R46.2 116.58,158.915 116.58,161.375 U41.13
OUTA: MOTOR.1 R49.2 U41.7 U41.10 | length 2.5
  Top Layer w0.5: R49.2@112.4,172.825 112.425,172.825 113.1,173.5 MOTOR.1
OUTB: D42.A D43.C MOTOR.2 U41.2 U41.15 | length 4.4
  Top Layer w0.5: D43.C D42.A 116.724,175.766 117.16,175.33 MOTOR.2
RX-BLE: Teensy-4.0.21 XIAO-C6.7 | length 54.8
  Top Layer w0.25: v2(117.295,120.077) 117.425,120.077 117.7,119.802 117.7,117.588 120.788,114.5 125.9,114.5 127.4,113 135.2,113 137.9,110.3 159.2,110.3 162.6,113.7 162.6,115.875 162.875,116.15 v2(163.06,116.15)
RX-CAM: CAM.5 Teensy-4.0.15 | length 56.7
  Top Layer w0.254: CAM.5 137.74,143.2 136.6,143.2 131.35,137.95 131.35,130.15 137.3,124.2 152.3,124.2 159.5,131.4 163.05,131.4 Teensy-4.0.15
RX-IMU: BNO085.SDA Teensy-4.0.16 | length 16.4
  Top Layer w0.25: v2(150.4,116.8) 150.4,120.39 158.86,128.85 Teensy-4.0.16
SCL: CAM.4 Teensy-4.0.19 | length 56
  Top Layer w0.254: CAM.4 129.9,137.9 129.9,129 136,122.9 149.7,122.9 v2(150.4,122.2)
  Bottom Layer w0.254: v2(150.4,122.2) 151.4,121.2 v2(163.1,121.2)
SDA: CAM.3 Teensy-4.0.18 | length 58.8
  Top Layer w0.254: CAM.3 128.9,139.44 128.9,127.1 134.9,121.1 v2(147,121.1)
  Bottom Layer w0.254: v2(147,121.1) 149.67,123.77 v2(159.66,123.77)
SERVO: SERVO.1 Teensy-4.0.22 | length 86.1
  Top Layer w0.3: v2(155.5,162.1) 159,162.1 170.1,151 170.1,138.3 165.7,133.9 165.7,119.9 164.7,118.9 163.2,118.9 159.66,115.36 Teensy-4.0.22
  Bottom Layer w0.3: v2(155.5,162.1) 150.1,167.5 150.1,172.6 151.25,173.75 159.05,173.75 160.04,174.74 SERVO.1
TX-BLE: Teensy-4.0.20 XIAO-C6.8 | length 61.8
  Top Layer w0.25: v2(105.455,120.077) 111.403,120.077 113.627,122.3 119.9,122.3 126.8,115.4 134.9,115.4 137.9,112.4 144.5,112.4 145,112.9 153.07,112.9 158.86,118.69 v2(159.66,118.69)
TX-CAM: CAM.2 Teensy-4.0.14 | length 53.9
  Top Layer w0.254: CAM.2 141.2,146.8 141.2,144.2 137.9,140.9 136.6,140.9 133.2,137.5 133.2,132.274 138.574,126.9 142.5,126.9 152,136.4 157.19,136.4 Teensy-4.0.14
TX-IMU: BNO085.SCL Teensy-4.0.17 | length 23.6
  Top Layer w0.254: BNO085.SCL 151.765,114.265 154,116.5 154,121.2 159.11,126.31 Teensy-4.0.17
VC: C42.2 C43.1 D41.1 Q41.5 U41.4 U41.5 U41.12 | length 9.5
  Top Layer w0.5: U41.12 U41.5 115.67,166.75 115.92,166.75 116.42,166.75 U41.4 116.555,167.1 U41.4@116.53,167.125 ; 122.42,163.575 122.445,163.55 C43.1
  other v1: 107.27,156.05 107.97,156.05 108.72,156.075 109.42,156.075 110.17,156.075 110.92,156.075 120.92,156.075 121.67,156.075 122.42,156.075 123.17,156.075 123.92,156.075 124.67,156.075 109.42,156.825 110.17,156.825 110.92,156.825 120.92,156.825 121.67,156.825 122.42,156.825 123.17,156.825 123.92,156.825 124.67,156.825 107.27,156.85 107.97,156.85 108.72,156.875 107.27,157.55 107.97,157.55 108.72,157.575 109.42,157.575 110.17,157.575 110.92,157.575 120.92,157.575 121.67,157.575 122.42,157.575 123.17,157.575 123.92,157.575 124.67,157.575 107.27,158.25 107.97,158.25 108.72,158.275 109.42,158.325 110.17,158.325 110.92,158.325 120.92,158.325 121.67,158.325 122.42,158.325 123.17,158.325 123.92,158.325 124.67,158.325 120.92,159.075 121.67,159.075 122.42,159.075 123.17,159.075 123.92,159.075 124.67,159.075 120.92,159.825 121.67,159.825 122.42,159.825 123.17,159.825 123.92,159.825 124.67,159.825 114.17,163.075 114.92,163.075 115.67,163.075 116.42,163.075 117.17,163.075 117.92,163.075 114.17,163.825 114.92,163.825 115.67,163.825 116.42,163.825 117.17,163.825 117.92,163.825 114.17,164.575 114.92,164.575 115.67,164.575 116.42,164.575 117.17,164.575 117.92,164.575 114.92,165.325 115.67,165.325 116.42,165.325 117.17,165.325 115.67,166.075 116.42,166.075 115.67,166.825 116.42,166.825 115.67,167.575 116.42,167.575
pads on no net: BNO085.3V BNO085.BT BNO085.CS BNO085.DI BNO085.INT BNO085.P0 BNO085.RST Button.1 Button.4 D24V10F3.5 D24V50F5.4 D24V50F5.5 LED.1 R45.1 XIAO-C6.1 XIAO-C6.2 XIAO-C6.3 XIAO-C6.4 XIAO-C6.5 XIAO-C6.6 XIAO-C6.9 XIAO-C6.10 XIAO-C6.11 XIAO-C6.12
copper on no net:
  other v3: 125,105 155,105 105,145 175,145 105,175 175,175

## Polygon pours and split planes (outlines as drawn)
GND on Bottom Layer "GND_L02_P026" (solid, pour order 26): 100,179 180,179 180,100 100,100
VC on Bottom Layer "Bottom Layer-VC" (solid, pour order 17): 106.42,160.575 106.42,155.325 125.42,155.325 125.42,160.825 120.17,160.825 120.17,158.325 119.17,158.325 119.17,164.325 117.17,166.325 117.17,168.575 114.67,168.575 114.67,166.825 112.67,164.825 112.67,158.325 111.67,158.325 111.67,160.575
OUTB on Bottom Layer "OUTB_L02_P018" (solid, pour order 18): 125.42,169.35 125.42,168.825 116.17,168.825 116.17,169.35
OUTA on Bottom Layer "OUTA_L02_P019" (solid, pour order 19): 115.92,169.35 115.92,168.825 106.42,168.825 106.42,169.35
GND on Bottom Layer "GND_L02_P022" (solid, pour order 22): 125.72,168.575 125.72,161.075 120.17,161.075 120.17,165.325 119.92,165.575 119.92,168.575
GND on Bottom Layer "GND_L02_P023" (solid, pour order 23): 111.92,168.575 111.92,165.325 111.67,165.075 111.67,160.825 106.12,160.825 106.12,168.575
GND on Top Layer "GND_L01_P027" (solid, pour order 27): 100,179 180,179 180,100 100,100
OUTB on Top Layer "OUTB_L01_P015" (solid, pour order 15): 116.12,168.825 116.12,174.2 117.72,174.2 119.67,172.25 119.67,168.825 119.67,159.575 118.67,159.575 118.67,165.325 117.42,166.575 117.42,168.825
+12V on Top Layer "+12V_L01_P011" (solid, pour order 11): 127.7,159 125.7,159 125.7,155.1 122.6,155.1 120.7,153.2 120.7,136.3 121.5,135.5 124,135.5 124.9,136.4 124.9,151.2 127.7,154
VC on Top Layer "VC_L01_P021" (solid, pour order 21): 125.42,155.325 125.42,160.825 124.17,160.825 124.17,164.075 121.17,164.075 121.17,160.575 120.32,160.575 120.32,155.325
GND on Top Layer "GND_L01_P012" (solid, pour order 12): 119.92,160.825 120.92,160.825 120.92,164.325 125.42,164.325 125.42,168.575 119.92,168.575
GND on Top Layer "GND_L01_P013" (solid, pour order 13): 111.92,168.575 111.92,159.575 106.42,159.575 106.42,168.575
VC on Top Layer "VC_L01_P014" (solid, pour order 14): 117.17,168.575 114.67,168.575 114.67,166.325 113.42,165.075 113.42,162.575 118.42,162.575 118.42,165.075 117.17,166.325
OUTA on Top Layer "OUTA_L01_P016" (solid, pour order 16): 115.62,168.825 115.62,174.2 113.395,174.2 112.12,172.925 112.12,168.825 112.17,168.825 112.17,159.575 113.27,159.575 113.27,165.175 114.42,166.325 114.42,168.825
VC on Top Layer "VC_L01_P020" (solid, pour order 20): 116.17,162.825 116.17,159.575 114.42,159.575 114.42,162.825
VC on Top Layer "VC_L01_P024" (solid, pour order 24): 111.52,159.275 111.52,155.325 106.42,155.325 106.42,159.275
+BAT on Top Layer "+BAT_L01_P025" (solid, pour order 25): 126,135 126.5,134.5 126.5,126 125.5,125 116,125 115,126 115,130.5 115.5,131 119,131 120.5,132.5 120.5,134.5 121,135

## Silkscreen, mask and mechanical layers (free items; w line width, h text height)
Top Overlay:
  drawing of 20 lines, arcs and shapes, not listed
  text "SRV" at 159.5,173.6 h0.5
  text "GND" at 154.3,173.5 h0.5
  text "+5V" at 156.8,173.5 h0.5
  text "PWM" at 116.5,171.6 h0.5
  text "INB" at 119.1,171.6 h0.5
  text "+5V" at 121.5,171.6 h0.5
  text "EA" at 124.4,171.6 h0.5
  text "EB" at 127.1,171.6 h0.5
  text "INA" at 113.7,171.5 h0.5
  text "GND" at 154,170.9 h0.5
  text "+5V" at 156.4,170.9 h0.5
  text "+3V" at 151.4,170.8 h0.5
  text "+5V" at 125.7,151.8 h0.5
  text "+12V" at 117.8,151.7 h0.5
  text "GND" at 122,151.7 h0.5
  text "BUTT" at 165.1,147.1 h0.5
  text "+3V" at 148.1,141.3 h0.5
  text "CLK" at 164.8,136.2 h0.5
  text "MI" at 171.5,136.1 h0.5
  text "TXC" at 164.8,133.7 h0.5
  text "MO" at 171.6,133.6 h0.5
  text "RXC" at 164.7,131.2 h0.5
  text "BUTT" at 171.6,131.2 h0.5
  text "EA" at 171.7,128.7 h0.5
  text "RXI" at 164.8,128.6 h0.5
  text "TXI" at 164.8,126.2 h0.5
  text "EB" at 171.6,126 h0.5
  text "CSF" at 171.6,123.5 h0.5
  text "SDA" at 164.8,123.4 h0.5
  text "CSR" at 171.5,121.1 h0.5
  text "SCL" at 164.8,121 h0.5
  text "TXX" at 107.6,119.9 h0.5
  text "RXX" at 113.9,119.9 h0.5
  text "TXX" at 164.8,118.6 h0.5
  text "CSB" at 171.4,118.5 h0.5
  text "RXI" at 144.3,116.5 h0.5
  text "RXX" at 164.7,115.9 h0.5
  text "CSL" at 171.4,115.9 h0.5
  text "TXI" at 144.2,114 h0.5
  text "SRV" at 164.7,113.4 h0.5
  text "INA" at 171.5,113.4 h0.5
  text "GND" at 146,111.4 h0.5
  text "BUZ" at 164.6,110.9 h0.5
  text "PWM" at 171.5,110.7 h0.5
  text "+3V" at 164.6,108.3 h0.5
  text "INB" at 171.5,108.3 h0.5
  text "+3V" at 144.1,106.4 h0.5
  text "GND" at 164.7,105.7 h0.5
  text "NEO" at 171.5,105.5 h0.5
  text "+5V" at 164.4,103.3 h0.5
  text "GND" at 171.5,103.1 h0.5
Bottom Overlay:
  drawing of 4483 lines, arcs and shapes, not listed
Mechanical 1:
  lines w0.1: 153.1,99.575 cw(c153.525,99.575) 153.525,100
Mechanical 2:
  circle w0.013: c125,105 r1.6
  circle w0.013: c175,145 r1.6
  circle w0.013: c155,105 r1.6
  circle w0.013: c175,175 r1.6
  circle w0.013: c105,145 r1.6
  lines w0.013: 100,101 100,178 cw(c101,178) 101,179 179,179 cw(c179,178) 180,178 180,101 cw(c179,101) 179,100 101,100